# Altium PCB PCB2.PcbDoc
Units mm, origin at the board's own origin, x right, y up, seen from the top; angles counter-clockwise.
Board outline 42.16 x 42.16 mm, 2 copper layers (Top Layer, Bottom Layer); 4 components, 65 nets, 132 pads, 0 vias.
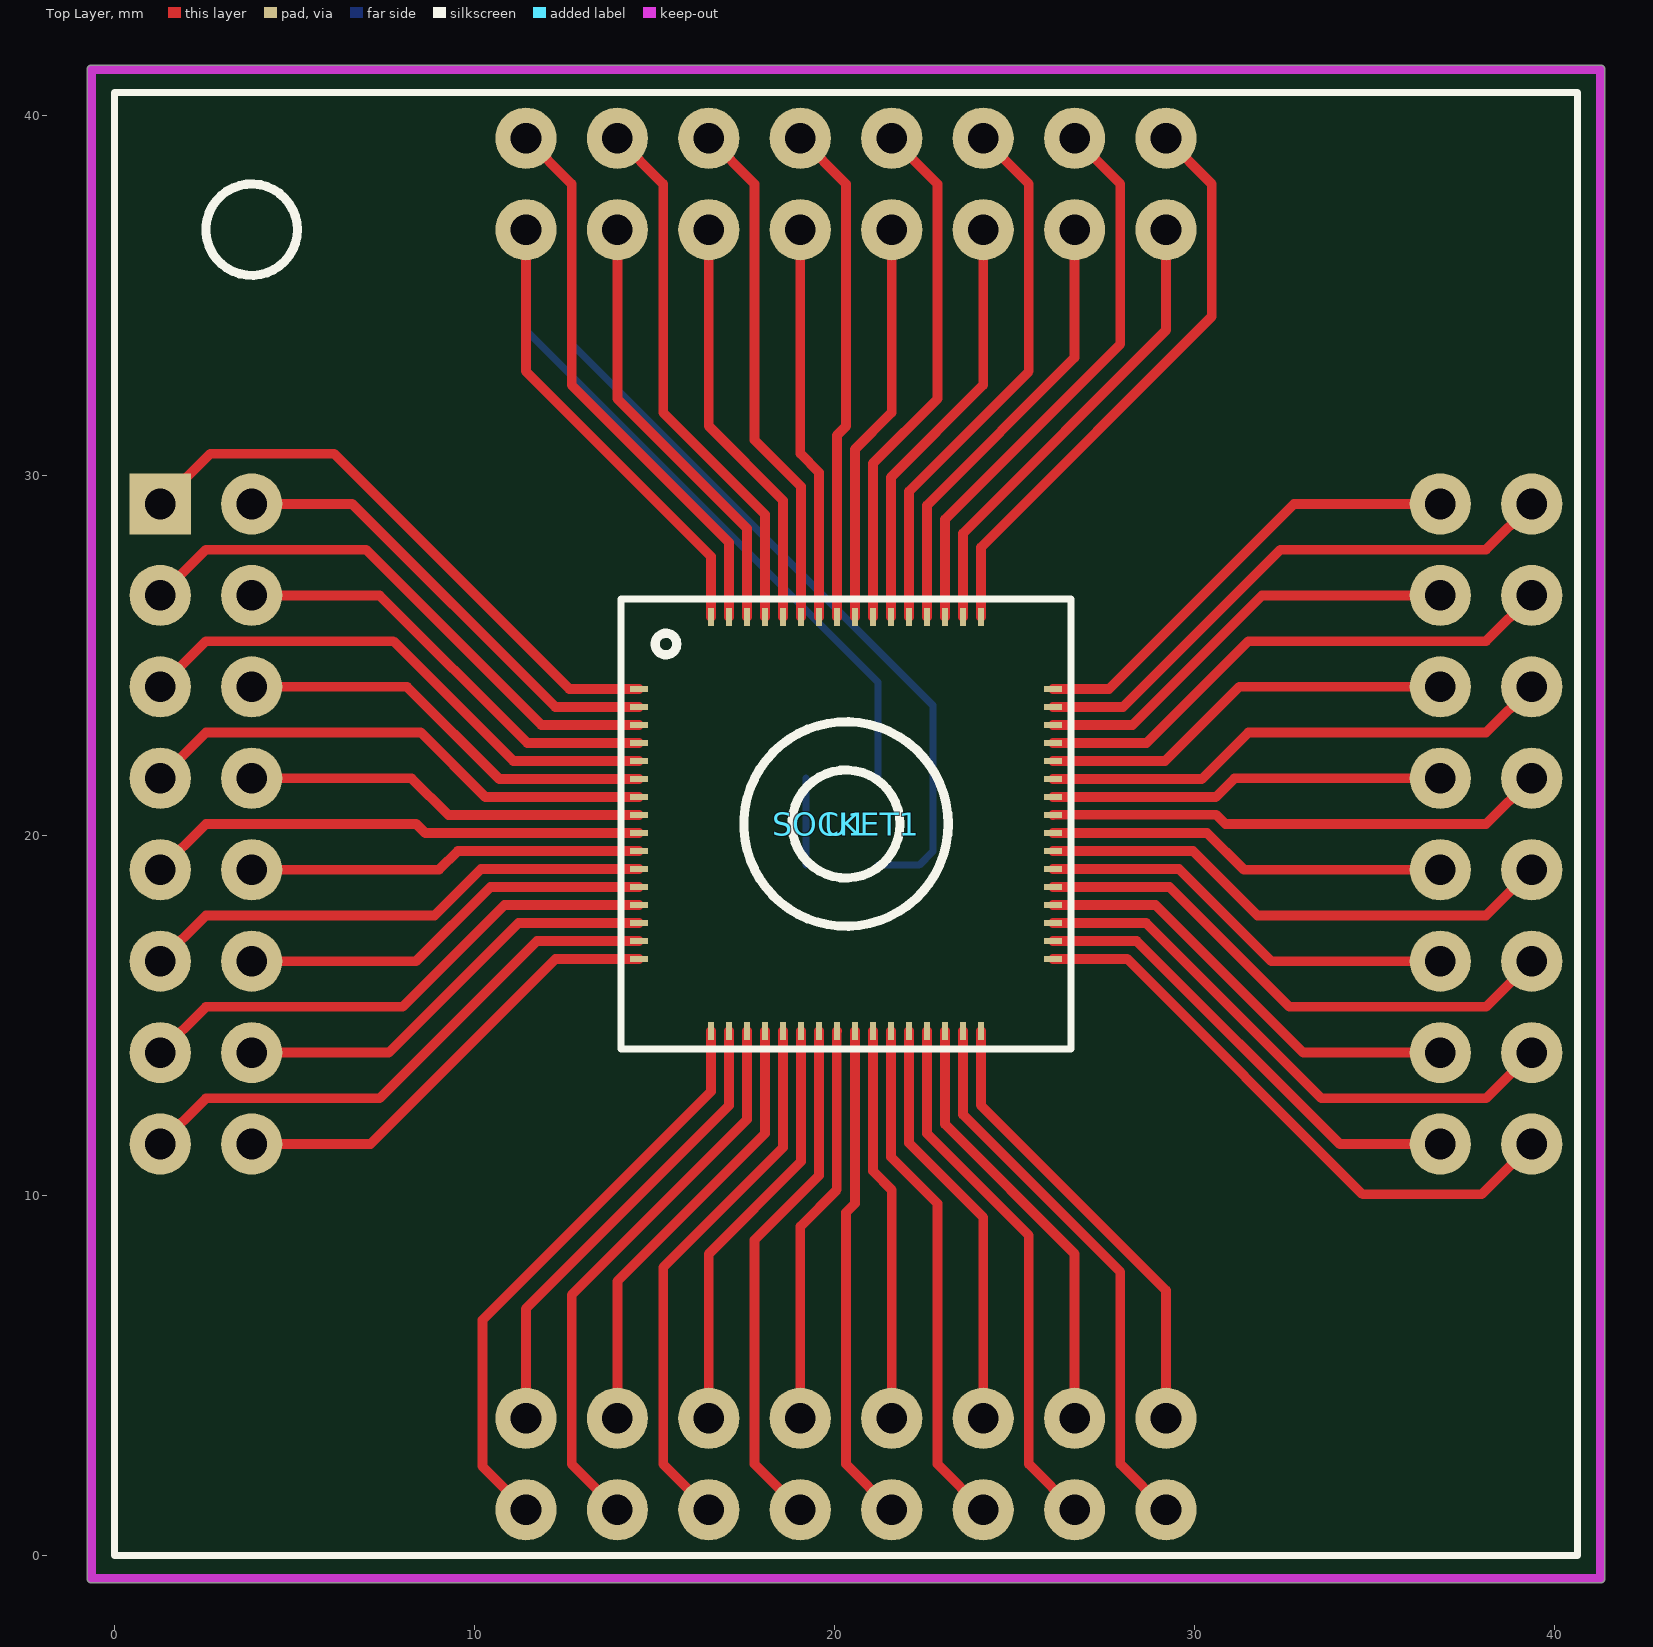
[diagram p0: Top Layer view]
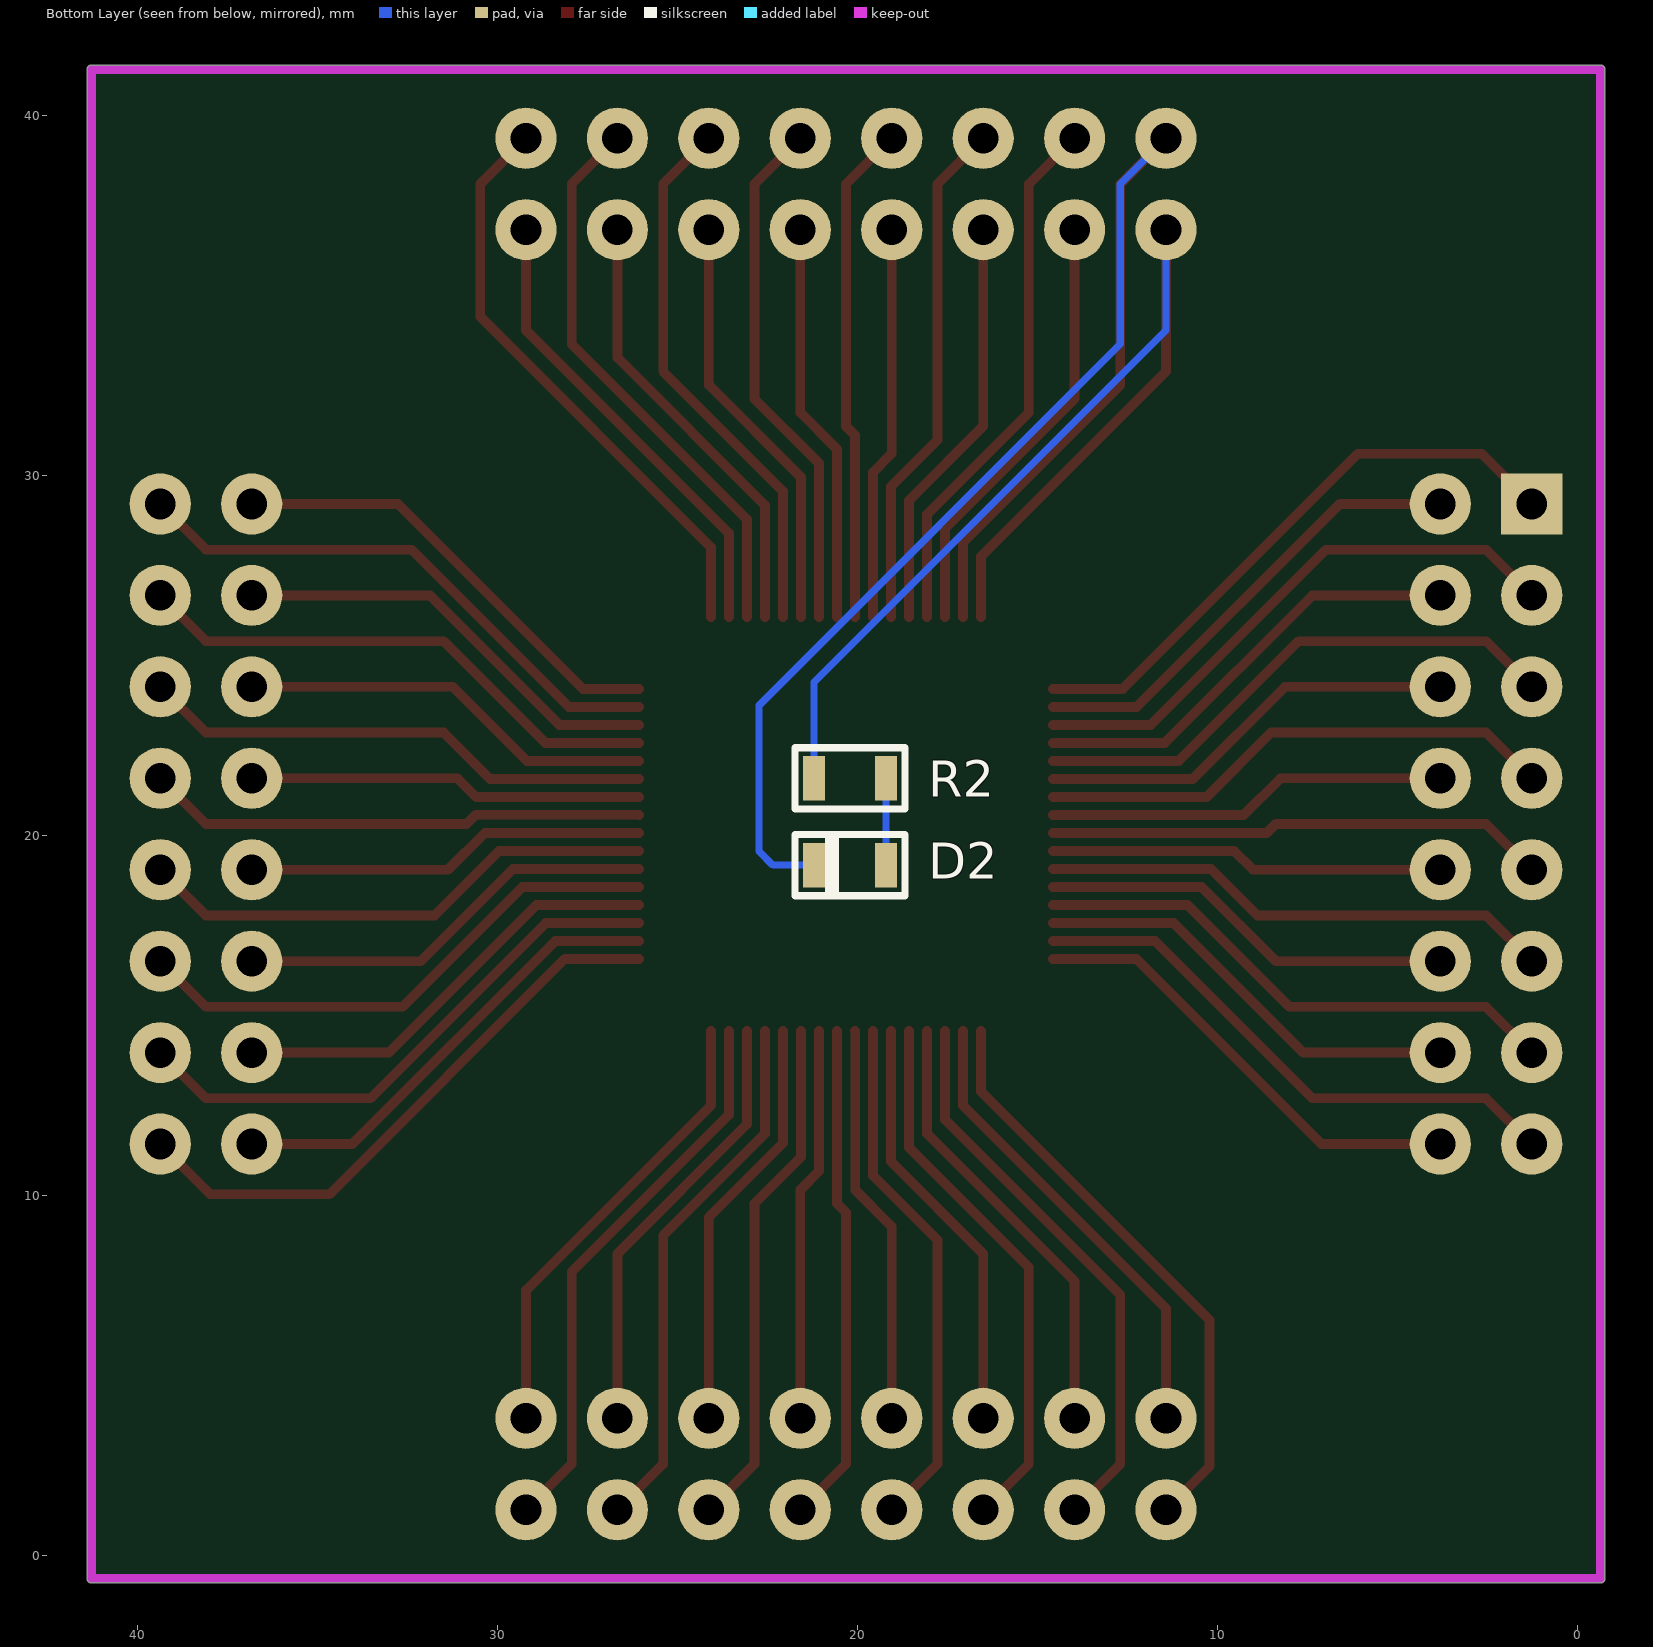
[diagram p1: Bottom Layer view, seen from below]

## Layer stack, top to bottom
Top Solder: solder mask 0.0102, Solder Resist, Dk 3.5
Top Layer: signal copper 0.0356
Dielectric 1: dielectric 0.32, FR-4, Dk 4.8
Bottom Layer: signal copper 0.0356
Bottom Solder: solder mask 0.0102, Solder Resist, Dk 3.5

## Board outline
-0.762,-0.635 ccw(c-0.635,-0.635) -0.635,-0.762 41.275,-0.762 ccw(c41.275,-0.635) 41.402,-0.635 41.402,41.275 ccw(c41.275,41.275) 41.275,41.402 -0.635,41.402 ccw(c-0.635,41.275) -0.762,41.275

## Design rules (kind name [scope] priority, off if disabled: settings)
Clearance [All] p1: gap=0.2 ignorepadtopadclearanceinfootprint=FALSE
PolygonConnect [All] p1: connectstyle=Relief reliefconductorwidth=0.254 reliefentries=4 polygonreliefangle="90 Angle" airgapwidth=0.254
RoutingVias [All] p1: holewidth=0.711 width=1.27 viastyle="Through Hole" minholewidth=0.711 minwidth=1.27 maxholewidth=0.711 maxwidth=1.27
SolderMaskExpansion [All] p1: expansion=0.102
Width [All] p1: maxlimit=0.5 minlimit=0.2 preferedwidth=0.2
30 further rules are at their usual default settings.

## Components (designator, comment, footprint, x,y, rotation, side; value= is the part's Value field where it differs from the comment)
D2 "LED0805" L0805RED 20.209,19.802 r0 bottom
R2 "10k" R0805 19.209,21.59 r180 bottom
SOCKET1 "SOCKET-ADAPTER-OTQ-64-05-03" SOCKET-ADAPTER-OTQ-64-05-03 20.32,20.32 r0 top
U1 "STM32F103RCT6" LQFP064_FPT-64P-M03 20.32,20.32 r0 top

## Footprints (in the part's own frame and the unit in brackets; to place one, negate y for a bottom-side part, rotate by r counter-clockwise, add the part's x,y. Pads: shape width x height; smd on the part's side, far side on the other; paste and mask are expansions set on the pad)
L0805RED [mm]
  rect 0.6x1.24 smd: 1(-1,0.625) 2(1,0.625)
  silkscreen extent -1.53,-0.23 1.52,1.47, body extent -1,0 1,1.25, height 1.1
LQFP064_FPT-64P-M03 [mm]
  rect 0.5x0.18 smd: 1(-5.75,3.75) 2(-5.75,3.25) 3(-5.75,2.75) 4(-5.75,2.25) 5(-5.75,1.75) 6(-5.75,1.25) 7(-5.75,0.75) 8(-5.75,0.25) 9(-5.75,-0.25) 10(-5.75,-0.75) 11(-5.75,-1.25) 12(-5.75,-1.75) 13(-5.75,-2.25) 14(-5.75,-2.75) 15(-5.75,-3.25) 16(-5.75,-3.75) 33(5.75,-3.75) 34(5.75,-3.25) 35(5.75,-2.75) 36(5.75,-2.25) 37(5.75,-1.75) 38(5.75,-1.25) 39(5.75,-0.75) 40(5.75,-0.25) 41(5.75,0.25) 42(5.75,0.75) 43(5.75,1.25) 44(5.75,1.75) 45(5.75,2.25) 46(5.75,2.75) 47(5.75,3.25) 48(5.75,3.75)
  rect 0.18x0.5 smd: 17(-3.75,-5.75) 18(-3.25,-5.75) 19(-2.75,-5.75) 20(-2.25,-5.75) 21(-1.75,-5.75) 22(-1.25,-5.75) 23(-0.75,-5.75) 24(-0.25,-5.75) 25(0.25,-5.75) 26(0.75,-5.75) 27(1.25,-5.75) 28(1.75,-5.75) 29(2.25,-5.75) 30(2.75,-5.75) 31(3.25,-5.75) 32(3.75,-5.75) 49(3.75,5.75) 50(3.25,5.75) 51(2.75,5.75) 52(2.25,5.75) 53(1.75,5.75) 54(1.25,5.75) 55(0.75,5.75) 56(0.25,5.75) 57(-0.25,5.75) 58(-0.75,5.75) 59(-1.25,5.75) 60(-1.75,5.75) 61(-2.25,5.75) 62(-2.75,5.75) 63(-3.25,5.75) 64(-3.75,5.75)
  silkscreen extent -6.25,-6.25 6.25,6.25, body extent -6,-6 6,6, height 1.5
R0805 [mm]
  rect 0.6x1.24 smd: 1(-2,0) 2(0,0)
  silkscreen extent -2.52,-0.85 0.53,0.85, body extent -2,-0.63 0,0.62, height 0.45
SOCKET-ADAPTER-OTQ-64-05-03 [mm]
  rect 1.7x1.7 hole 0.85: 1(-19.05,8.89)
  round 1.7 hole 0.85: 2(-16.51,8.89) 3(-19.05,6.35) 4(-16.51,6.35) 5(-19.05,3.81) 6(-16.51,3.81) 7(-19.05,1.27) 8(-16.51,1.27) 9(-19.05,-1.27) 10(-16.51,-1.27) 11(-19.05,-3.81) 12(-16.51,-3.81) 13(-19.05,-6.35) 14(-16.51,-6.35) 15(-19.05,-8.89) 16(-16.51,-8.89) 17(-8.89,-19.05) 18(-8.89,-16.51) 19(-6.35,-19.05) 20(-6.35,-16.51) 21(-3.81,-19.05) 22(-3.81,-16.51) 23(-1.27,-19.05) 24(-1.27,-16.51) 25(1.27,-19.05) 26(1.27,-16.51) 27(3.81,-19.05) 28(3.81,-16.51) 29(6.35,-19.05) 30(6.35,-16.51) 31(8.89,-19.05) 32(8.89,-16.51) 33(19.05,-8.89) 34(16.51,-8.89) 35(19.05,-6.35) 36(16.51,-6.35) 37(19.05,-3.81) 38(16.51,-3.81) 39(19.05,-1.27) 40(16.51,-1.27) 41(19.05,1.27) 42(16.51,1.27) 43(19.05,3.81) 44(16.51,3.81) 45(19.05,6.35) 46(16.51,6.35) 47(19.05,8.89) 48(16.51,8.89) 49(8.89,19.05) 50(8.89,16.51) 51(6.35,19.05) 52(6.35,16.51) 53(3.81,19.05) 54(3.81,16.51) 55(1.27,19.05) 56(1.27,16.51) 57(-1.27,19.05) 58(-1.27,16.51) 59(-3.81,19.05) 60(-3.81,16.51) 61(-6.35,19.05) 62(-6.35,16.51) 63(-8.89,19.05) 64(-8.89,16.51)
  silkscreen extent -20.32,-20.32 20.32,20.32, body extent -20.32,-20.32 20.32,20.32, height 9.5

## Part data
R2: library part "Resistor SMD"
U1: "LQFP64"

## Nets (pads, with @x,y where several pads share a name; then routed paths per layer and width w, separated by ;. In a path a pad name is that pad's centre, name@x,y a point inside that pad or via, vN(x,y) a via of type N, cw(c..) or ccw(c..) an arc to the next point about the centre after c; other vN are vias at no path point)
NetD2_1: D2.1 R2.2 | length 2.4
  Bottom Layer w0.2: D2.1 R2.2
PIN1: SOCKET1.1 U1.1 | length 16.6
  Top Layer w0.27: SOCKET1.1 2.667,30.607 6.096,30.607 12.633,24.07 U1.1
PIN2: SOCKET1.2 U1.2 | length 13.1
  Top Layer w0.27: SOCKET1.2 6.604,29.21 12.244,23.57 U1.2
PIN3: SOCKET1.3 U1.3 | length 15.8
  Top Layer w0.27: SOCKET1.3 2.54,27.94 6.985,27.94 11.855,23.07 U1.3
PIN4: SOCKET1.4 U1.4 | length 12.5
  Top Layer w0.27: SOCKET1.4 7.366,26.67 11.466,22.57 U1.4
PIN5: SOCKET1.5 U1.5 | length 15.2
  Top Layer w0.27: SOCKET1.5 2.54,25.4 7.747,25.4 11.077,22.07 U1.5
PIN6: SOCKET1.6 U1.6 | length 11.8
  Top Layer w0.27: SOCKET1.6 8.128,24.13 10.688,21.57 U1.6
PIN7: SOCKET1.7 U1.7 | length 14.6
  Top Layer w0.27: SOCKET1.7 2.54,22.86 8.509,22.86 10.299,21.07 U1.7
PIN8: SOCKET1.8 U1.8 | length 11.2
  Top Layer w0.27: SOCKET1.8 8.255,21.59 9.275,20.57 U1.8
PIN9: SOCKET1.9 U1.9 | length 13.9
  Top Layer w0.27: SOCKET1.9 2.54,20.32 8.382,20.32 8.632,20.07 U1.9
PIN10: SOCKET1.10 U1.10 | length 11
  Top Layer w0.27: SOCKET1.10 9.017,19.05 9.537,19.57 U1.10
PIN11: SOCKET1.11 U1.11 | length 14.4
  Top Layer w0.27: SOCKET1.11 2.54,17.78 8.89,17.78 10.18,19.07 U1.11
PIN12: SOCKET1.12 U1.12 | length 11.6
  Top Layer w0.27: SOCKET1.12 8.382,16.51 10.442,18.57 U1.12
PIN13: SOCKET1.13 U1.13 | length 15
  Top Layer w0.27: SOCKET1.13 2.54,15.24 8.001,15.24 10.831,18.07 U1.13
PIN14: SOCKET1.14 U1.14 | length 12.3
  Top Layer w0.27: SOCKET1.14 7.62,13.97 11.22,17.57 U1.14
PIN15: SOCKET1.15 U1.15 | length 15.6
  Top Layer w0.27: SOCKET1.15 2.54,12.7 7.366,12.7 11.736,17.07 U1.15
PIN16: SOCKET1.16 U1.16 | length 12.9
  Top Layer w0.27: SOCKET1.16 7.112,11.43 12.252,16.57 U1.16
PIN17: SOCKET1.17 U1.17 | length 16.4
  Top Layer w0.27: SOCKET1.17 10.223,2.477 10.223,6.54 16.57,12.887 U1.17
PIN18: SOCKET1.18 U1.18 | length 13.1
  Top Layer w0.27: SOCKET1.18 11.43,6.858 17.07,12.498 U1.18
PIN19: SOCKET1.19 U1.19 | length 15.8
  Top Layer w0.27: SOCKET1.19 12.7,2.54 12.7,7.239 17.57,12.109 U1.19
PIN20: SOCKET1.20 U1.20 | length 12.5
  Top Layer w0.27: SOCKET1.20 13.97,7.62 18.07,11.72 U1.20
PIN21: SOCKET1.21 U1.21 | length 15.2
  Top Layer w0.27: SOCKET1.21 15.24,2.54 15.24,8.001 18.57,11.331 U1.21
PIN22: SOCKET1.22 U1.22 | length 11.8
  Top Layer w0.27: SOCKET1.22 16.51,8.382 19.07,10.942 U1.22
PIN23: SOCKET1.23 U1.23 | length 14.6
  Top Layer w0.27: SOCKET1.23 17.78,2.54 17.78,8.763 19.57,10.553 U1.23
PIN24: SOCKET1.24 U1.24 | length 11.2
  Top Layer w0.27: SOCKET1.24 19.05,9.144 20.066,10.16 20.066,14.566 U1.24
PIN25: SOCKET1.25 U1.25 | length 13.9
  Top Layer w0.27: U1.25 20.57,9.775 20.32,9.525 20.32,2.54 SOCKET1.25
PIN26: SOCKET1.26 U1.26 | length 11
  Top Layer w0.27: U1.26 21.07,10.68 21.59,10.16 SOCKET1.26
PIN27: SOCKET1.27 U1.27 | length 14.4
  Top Layer w0.27: U1.27 21.57,11.069 22.86,9.779 22.86,2.54 SOCKET1.27
PIN28: SOCKET1.28 U1.28 | length 11.6
  Top Layer w0.27: U1.28 22.07,11.458 24.13,9.398 SOCKET1.28
PIN29: SOCKET1.29 U1.29 | length 15
  Top Layer w0.27: U1.29 22.57,11.72 25.4,8.89 25.4,2.54 SOCKET1.29
PIN30: SOCKET1.30 U1.30 | length 12.3
  Top Layer w0.27: U1.30 23.07,11.982 26.67,8.382 SOCKET1.30
PIN31: SOCKET1.31 U1.31 | length 15.6
  Top Layer w0.27: U1.31 23.57,12.244 27.94,7.874 27.94,2.54 SOCKET1.31
PIN32: SOCKET1.32 U1.32 | length 12.9
  Top Layer w0.27: U1.32 24.07,12.506 29.21,7.366 SOCKET1.32
PIN33: SOCKET1.33 U1.33 | length 16.6
  Top Layer w0.27: U1.33 28.134,16.57 34.671,10.033 37.973,10.033 SOCKET1.33
PIN34: SOCKET1.34 U1.34 | length 13.1
  Top Layer w0.27: U1.34 28.396,17.07 34.036,11.43 SOCKET1.34
PIN35: SOCKET1.35 U1.35 | length 15.8
  Top Layer w0.27: U1.35 28.658,17.57 33.528,12.7 38.1,12.7 SOCKET1.35
PIN36: SOCKET1.36 U1.36 | length 12.5
  Top Layer w0.27: U1.36 28.92,18.07 33.02,13.97 SOCKET1.36
PIN37: SOCKET1.37 U1.37 | length 15.2
  Top Layer w0.27: U1.37 29.309,18.57 32.639,15.24 38.1,15.24 SOCKET1.37
PIN38: SOCKET1.38 U1.38 | length 11.8
  Top Layer w0.27: U1.38 29.571,19.07 32.131,16.51 SOCKET1.38
PIN39: SOCKET1.39 U1.39 | length 14.6
  Top Layer w0.27: U1.39 29.96,19.57 31.75,17.78 38.1,17.78 SOCKET1.39
PIN40: SOCKET1.40 U1.40 | length 11.2
  Top Layer w0.27: U1.40 30.349,20.07 31.369,19.05 SOCKET1.40
PIN41: SOCKET1.41 U1.41 | length 13.9
  Top Layer w0.27: U1.41 26.074,20.574 30.607,20.574 30.861,20.32 38.1,20.32 SOCKET1.41
PIN42: SOCKET1.42 U1.42 | length 11
  Top Layer w0.27: U1.42 30.595,21.07 31.115,21.59 SOCKET1.42
PIN43: SOCKET1.43 U1.43 | length 14.4
  Top Layer w0.27: U1.43 30.206,21.57 31.496,22.86 38.1,22.86 SOCKET1.43
PIN44: SOCKET1.44 U1.44 | length 11.6
  Top Layer w0.27: U1.44 29.182,22.07 31.242,24.13 SOCKET1.44
PIN45: SOCKET1.45 U1.45 | length 15
  Top Layer w0.27: U1.45 28.666,22.57 31.496,25.4 38.1,25.4 SOCKET1.45
PIN46: SOCKET1.46 U1.46 | length 12.3
  Top Layer w0.27: U1.46 28.277,23.07 31.877,26.67 SOCKET1.46
PIN47: SOCKET1.47 U1.47 | length 15.6
  Top Layer w0.27: U1.47 28.015,23.57 32.385,27.94 38.1,27.94 SOCKET1.47
PIN48: SOCKET1.48 U1.48 | length 12.9
  Top Layer w0.27: U1.48 27.626,24.07 32.766,29.21 SOCKET1.48
PIN49: SOCKET1.49 U1.49 | length 16.5
  Top Layer w0.27: U1.49 24.07,28.007 30.48,34.417 30.48,38.1 SOCKET1.49
PIN50: SOCKET1.50 U1.50 | length 13.1
  Top Layer w0.27: U1.50 23.57,28.396 29.21,34.036 SOCKET1.50
PIN51: SOCKET1.51 U1.51 | length 15.8
  Top Layer w0.27: U1.51 23.07,28.785 27.94,33.655 27.94,38.1 SOCKET1.51
PIN52: SOCKET1.52 U1.52 | length 12.5
  Top Layer w0.27: U1.52 22.57,29.174 26.67,33.274 SOCKET1.52
PIN53: SOCKET1.53 U1.53 | length 15.2
  Top Layer w0.27: U1.53 22.07,29.563 25.4,32.893 25.4,38.1 SOCKET1.53
PIN54: SOCKET1.54 U1.54 | length 11.8
  Top Layer w0.27: U1.54 21.57,29.952 24.13,32.512 SOCKET1.54
PIN55: SOCKET1.55 U1.55 | length 14.6
  Top Layer w0.27: U1.55 21.07,30.341 22.86,32.131 22.86,38.1 SOCKET1.55
PIN56: SOCKET1.56 U1.56 | length 11.2
  Top Layer w0.27: U1.56 20.57,30.73 21.59,31.75 SOCKET1.56
PIN57: SOCKET1.57 U1.57 | length 13.9
  Top Layer w0.27: SOCKET1.57 20.32,38.1 20.32,31.369 20.07,31.119 U1.57
PIN58: SOCKET1.58 U1.58 | length 11
  Top Layer w0.27: SOCKET1.58 19.05,30.607 19.57,30.087 U1.58
PIN59: SOCKET1.59 U1.59 | length 14.4
  Top Layer w0.27: SOCKET1.59 17.78,38.1 17.78,30.988 19.07,29.698 U1.59
PIN60: SOCKET1.60 U1.60 | length 11.6
  Top Layer w0.27: SOCKET1.60 16.51,31.369 18.57,29.309 U1.60
PIN61: SOCKET1.61 U1.61 | length 15
  Top Layer w0.27: SOCKET1.61 15.24,38.1 15.24,31.75 18.07,28.92 U1.61
PIN62: SOCKET1.62 U1.62 | length 12.3
  Top Layer w0.27: SOCKET1.62 13.97,32.131 17.57,28.531 U1.62
PIN63: D2.2 SOCKET1.63 U1.63 | length 41.8
  Top Layer w0.27: SOCKET1.63 12.7,38.1 12.7,32.512 17.07,28.142 U1.63
  Bottom Layer w0.2: SOCKET1.63 12.7,38.1 12.7,33.655 22.733,23.622 22.733,19.558 22.352,19.177 D2.2
PIN64: R2.1 SOCKET1.64 U1.64 | length 32.2
  Top Layer w0.27: SOCKET1.64 11.43,32.893 16.57,27.753 U1.64
  Bottom Layer w0.2: SOCKET1.64 11.43,34.036 21.209,24.257 R2.1

## Keep-outs
Keep-Out Layer:
  lines w0.254: -0.635,-0.635 -0.635,41.275 41.275,41.275 41.275,-0.635 -0.635,-0.635